# Altium PCB power_sys_pcb.PcbDoc
Units mm, origin at the board's own origin, x right, y up, seen from the top; angles counter-clockwise.
Board outline 42.04 x 35.94 mm, 2 copper layers (Top Layer, Bottom Layer); 11 components, 11 nets, 28 pads, 2 vias.
Unrouted connection lines stored in the file: 1.
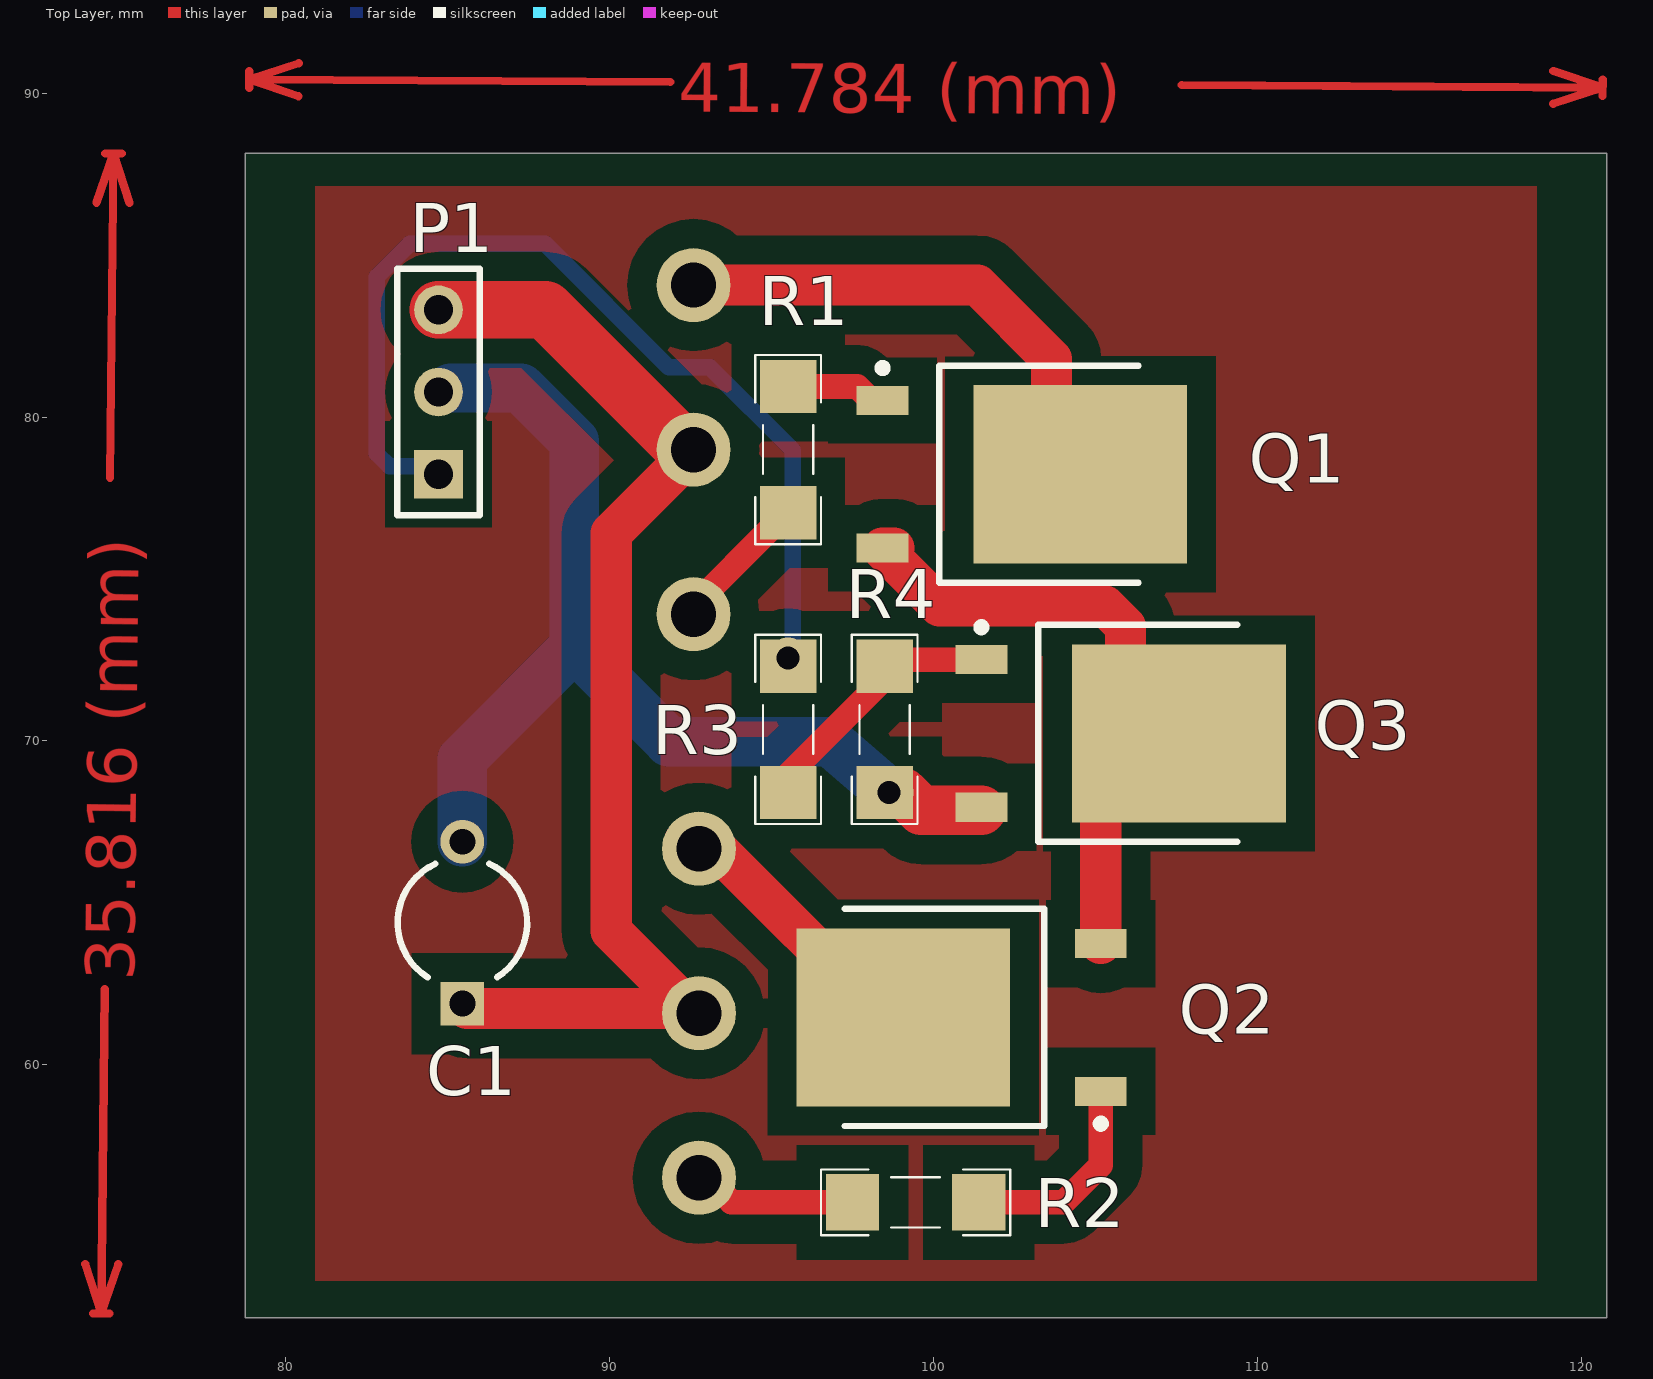
[diagram p0: Top Layer view]
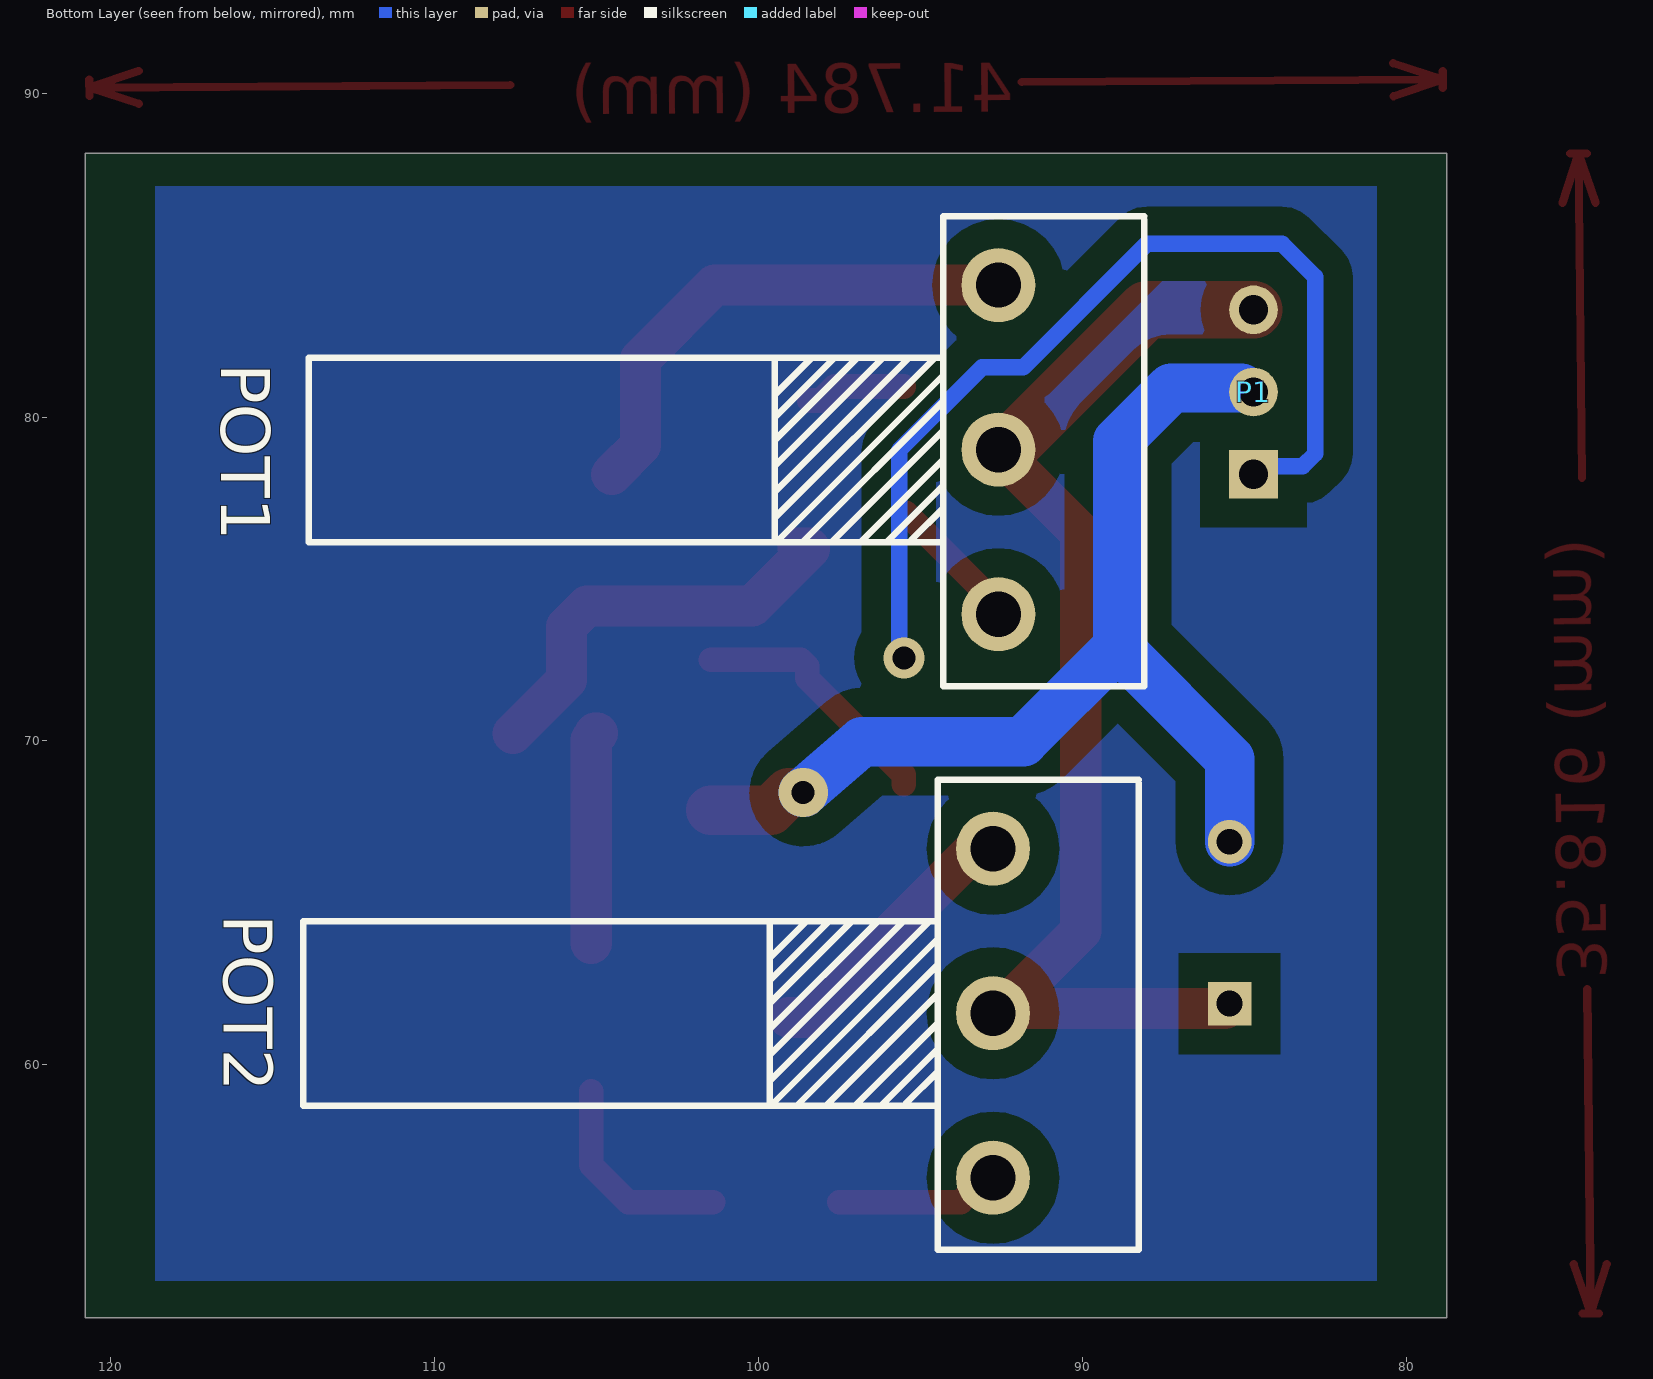
[diagram p1: Bottom Layer view, seen from below]
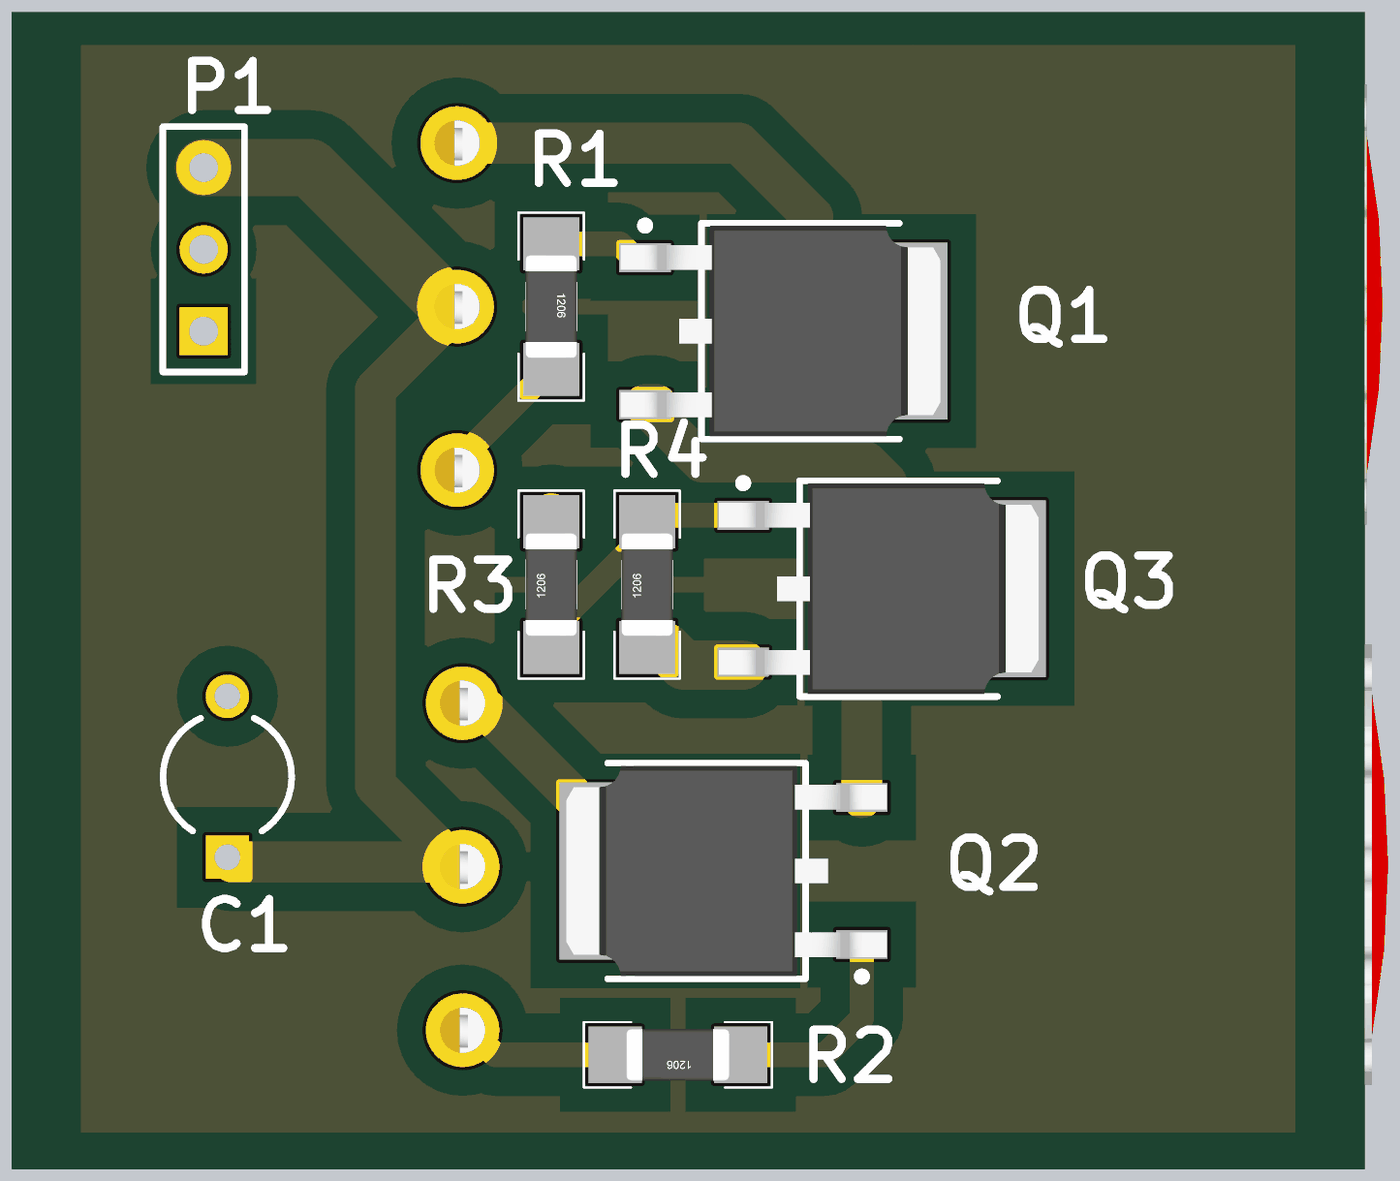
[diagram p2: 3D render of the assembled board from above, using the file's embedded part models]

## Layer stack, top to bottom
Top Solder: solder mask 0.0102, Solder Resist, Dk 3.5
Top Layer: signal copper 0.0356
Dielectric 1: dielectric 0.32, FR-4, Dk 4.8
Bottom Layer: signal copper 0.0356
Bottom Solder: solder mask 0.0102, Solder Resist, Dk 3.5

## Board outline
78.74,52.197 120.777,52.197 120.777,88.138 78.74,88.138

## Design rules (kind name [scope] priority, off if disabled: settings)
Clearance [All] p1: gap=0.254 ignorepadtopadclearanceinfootprint=FALSE except(0: Arc-Hole Track-Hole SMDPad-Hole THPad-Hole Via-Hole Fill-Hole Poly-Hole Region-Hole Text-Hole; 0.889: Arc-Poly Track-Poly SMDPad-Poly THPad-Poly Via-Poly)
PolygonConnect [All] p1: connectstyle=Relief reliefconductorwidth=0.254 reliefentries=4 polygonreliefangle="90 Angle" airgapwidth=0.254
RoutingVias [All] p1: holewidth=0.711 width=1.27 viastyle="Through Hole" minholewidth=0.711 minwidth=1.27 maxholewidth=0.711 maxwidth=1.27
SolderMaskExpansion [All] p1: expansion=0.102
Width [All] p1: maxlimit=2.54 minlimit=0.254 preferedwidth=0.254
30 further rules are at their usual default settings.

## Components (designator, comment, footprint, x,y, rotation, side; value= is the part's Value field where it differs from the comment)
C1 "Cap2" CAPR5-4X5 85.446,64.389 r90 top value=470uF
P1 "Header 3" HDR1X3 84.709,78.232 r90 bottom
POT1 "10K" POT 92.583,84.074 r270 bottom
POT2 "10K" POT 92.751,66.675 r270 bottom
Q1 "AOD472" TO252-3L 102.721,78.232 r0 top
Q2 "AOD472" TO252-3L 100.856,61.462 r180 top
Q3 "AOD472" TO252-3L 105.769,70.231 r0 top
R1 "10K" RESC4817X04N 95.504,78.994 r270 top
R2 "10K" RESC4817X04N 99.441,55.753 r180 top
R3 "1K" RESC4817X04N 95.504,70.358 r90 top
R4 "1K" RESC4817X04N 98.484,70.358 r90 top

## Footprints (in the part's own frame and the unit in brackets; to place one, negate y for a bottom-side part, rotate by r counter-clockwise, add the part's x,y. Pads: shape width x height; smd on the part's side, far side on the other; paste and mask are expansions set on the pad)
CAPR5-4X5 [mm] "Capacitor; 2 Leads"
  rect 1.35x1.35 hole 0.8: 1(-2.5,0)
  round 1.35 hole 0.8: 2(2.5,0)
  silkscreen extent -1.69,-2 1.82,2
HDR1X3 [mm] "Connector; Header; 3 Position"
  rect 1.5x1.5 hole 0.9: 1(0,0)
  round 1.5 hole 0.9: 2(2.54,0) 3(5.08,0)
POT [mil] "Voloume"
  round 90 hole 55: 1(0,0) 2(400,0) 3(200,0)
  silkscreen extent -83,-839 487,177, body extent -109,-1132 511,193, height 926
RESC4817X04N [mm] "Chip Resistor, 2-Leads, Body 4/80x1/70mm, IPC Medium Density-Design:Abbas Basereh"
  rect 1.65x1.75 smd: 1(-1.95,0) 2(1.95,0)
  silkscreen extent -2.92,-1.02 2.92,1.02, body extent -1.6,-0.8 1.6,0.8, height 1
TO252-3L [mm] "D-PAK, 3-Pads, Body 6.2x6.7mm (max), IPC High Density"
  rect 1.6x0.9 smd: 1(-4.3,2.28) 3(-4.3,-2.28)
  rect 6.6x5.5 smd: 4(1.8,0)
  silkscreen extent -4.42,-3.35 3.6,3.4, body extent -5.06,-3.27 4.88,3.27, height 2.39

## Part data
C1: "Capacitor", PackageDescription="Capacitor; 2 Leads", PackageReference=CAPR5-4X5, Published=23-Sep-2002, Publisher="Altium Limited"
P1: "Header, 3-Pin", LatestRevisionDate=17-Jul-2002, LatestRevisionNote="Re-released for DXP Platform.", Publisher="Altium Limited", System=Connector
POT1 POT2: library part POT, "Variable Resistor"
Q1 Q2 Q3: "N-channel MOSFET", ComponentLink1Description="Manufacturer Link", ComponentLink2Description=Datasheet, ComponentLink2URL=http://www.roboeq.ir/files/id/2912/name/aod472.pdf/, DatasheetVersion=2017-1-12, Note="Pin 2 is trimmed (and not drawn) and is electrically connected to Drain", PackageDescription="D-PAK TO-252", PackageReference="D-PAK TO-252", PackageVersion=2017-1-12, Published=2017-1-12, Publisher="Abbas Basereh"
R1 R2 R3 R4: library part "RES 1206 0.25W", "RES 1206", Data=16-12-2016, Desc.="RES SMD 1206", Designer="Abbas Basereh"

## Via types
v1: diameter 1.27, hole 0.711, Top Layer to Bottom Layer, 1 vias
v2: diameter 1.524, hole 0.711, Top Layer to Bottom Layer, 1 vias

## Nets (pads, with @x,y where several pads share a name; then routed paths per layer and width w, separated by ;. In a path a pad name is that pad's centre, name@x,y a point inside that pad or via, vN(x,y) a via of type N, cw(c..) or ccw(c..) an arc to the next point about the centre after c; other vN are vias at no path point)
gate1: Q3.1 R3.1 R4.2 | length 7.9
  Top Layer w0.762: R3.1@95.504,68.662 95.504,68.961 98.484,71.941 R4.2 98.687,72.511 Q3.1
gate2: Q1.1 R1.1 | length 3.1
  Top Layer w0.762: R1.1 97.639,80.944 98.071,80.512 Q1.1
GND: C1.2 P1.2 Q3.3 R4.1 | length 33.1
  Top Layer w1.524: v2(98.611,68.408) 99.063,68.408 99.615,67.856 Q3.3@101.469,67.856
  Bottom Layer w0.762: C1.2@85.217,66.889 C1.2@85.344,67.016
  Bottom Layer w1.524: P1.2@85.09,80.899 87.249,80.899 88.9,79.248 88.9,72.898 ; C1.2 85.446,69.444 88.9,72.898 ; v2(98.611,68.408) 96.795,69.977 91.821,69.977 88.9,72.898
NetPOT1_1: POT1.1 Q1.4 | length 16.4
  Top Layer w1.27: POT1.1@92.202,83.82 92.456,84.074 101.346,84.074 103.632,81.788 103.632,79.121 Q1.4
NetPOT1_2: POT1.2 R1.2 | length 4.8
  Top Layer w0.762: POT1.2@92.202,73.66 92.202,73.792 95.454,77.044 R1.2
NetPOT2_1: POT2.1 Q2.4 | length 9
  Top Layer w1.27: POT2.1@92.329,66.929 92.523,66.735 93.233,66.735 98.506,61.462 Q2.4
NetPOT2_2: POT2.2 R2.2 | length 5.6
  Top Layer w0.762: POT2.2@92.329,56.769 92.741,56.769 93.757,55.753 R2.2
NetQ1_3: Q1.3 Q2.3 Q3.4 | length 19.5
  Top Layer w1.27: Q1.3@98.768,75.952 Q1.3 98.421,75.932 100.185,74.168 105.283,74.168 105.918,73.533 105.918,71.882 Q3.4 ; Q3.4@105.033,70.237 104.96,70.237 105.156,70.041 Q2.3
NetQ2_1: Q2.1 R2.1 | length 6.5
  Top Layer w0.762: R2.1 104.013,55.753 105.156,56.896 Q2.1
output_pulse_P: P1.1 R3.2 | length 29.8
  Bottom Layer w0.508: P1.1@84.455,78.232 84.201,78.486 83.185,78.486 82.804,78.867 82.804,84.328 83.82,85.344 88.011,85.344 91.821,81.534 93.091,81.534 95.65,78.975 95.65,72.708 v1(95.504,72.562)
VCC: C1.1 P1.3 POT1.3 POT2.3 | length 36.5
  Top Layer w0.762: C1.1@85.217,61.889 85.331,62.003 C1.1@85.471,62.143 ; C1.1 C1.1@85.593,61.742 ; POT2.3@92.563,61.742 POT2.3@92.71,61.595
  Top Layer w1.27: C1.1@85.593,61.742 POT2.3@92.563,61.742 ; POT2.3@92.329,61.849 90.043,64.135 90.043,76.413 POT1.3@92.329,78.699 ; POT1.3@92.329,78.486 POT1.3@92.329,78.699 ; POT1.3@92.329,78.994 POT1.3@92.329,78.699 ; POT1.3@92.37,78.74 POT1.3@92.329,78.699
  Top Layer w1.778: P1.3 88.011,83.312 POT1.3@92.329,78.994
copper on no net: | length 60.9
  Top Layer w0.254: 73.803,53.853 74.295,52.324 ; 74.041,52.327 74.549,52.321 ; 74.152,86.619 74.676,88.138 ; 74.401,62.334 74.295,52.324 ; 74.422,88.141 74.93,88.135 ; 74.57,78.128 74.676,88.138 ; 74.819,53.843 74.295,52.324 ; 75.168,86.609 74.676,88.138 ; 78.865,90.17 78.869,90.678 ; 80.388,89.907 78.867,90.424 ; 80.394,90.923 78.867,90.424 ; 91.862,90.345 78.867,90.424 ; 107.655,90.249 120.65,90.17 ; 119.123,89.671 120.65,90.17 ; 119.129,90.687 120.65,90.17 ; 120.648,89.916 120.652,90.424

## Polygon pours and split planes (outlines as drawn)
no net on Top Layer "NONET_L01_P000" (solid, pour order 0): 80.899,87.122 118.618,87.122 118.618,53.34 80.899,53.34
no net on Bottom Layer "NONET_L02_P002" (solid, pour order 2): 80.899,87.122 118.618,87.122 118.618,53.34 80.899,53.34

## Other copper
Top Layer:
  text "41.784 (mm)" at 92.11,89.429 h1.52 r359.65
  text "35.816 (mm)" at 75.318,62.579 h1.52 r89.39

## Silkscreen, mask and mechanical layers (free items; w line width, h text height)
Mechanical 1:
  lines w0.254: 78.74,52.324 78.74,88.138 120.777,88.138 120.777,52.324 78.74,52.324